# Altium PCB PN-Power.PcbDoc
Units mm, origin at the board's own origin, x right, y up, seen from the top; angles counter-clockwise.
Board outline 44.12 x 67.89 mm, 2 copper layers (Top Layer, Bottom Layer); 24 components, 12 nets, 57 pads, 0 vias.
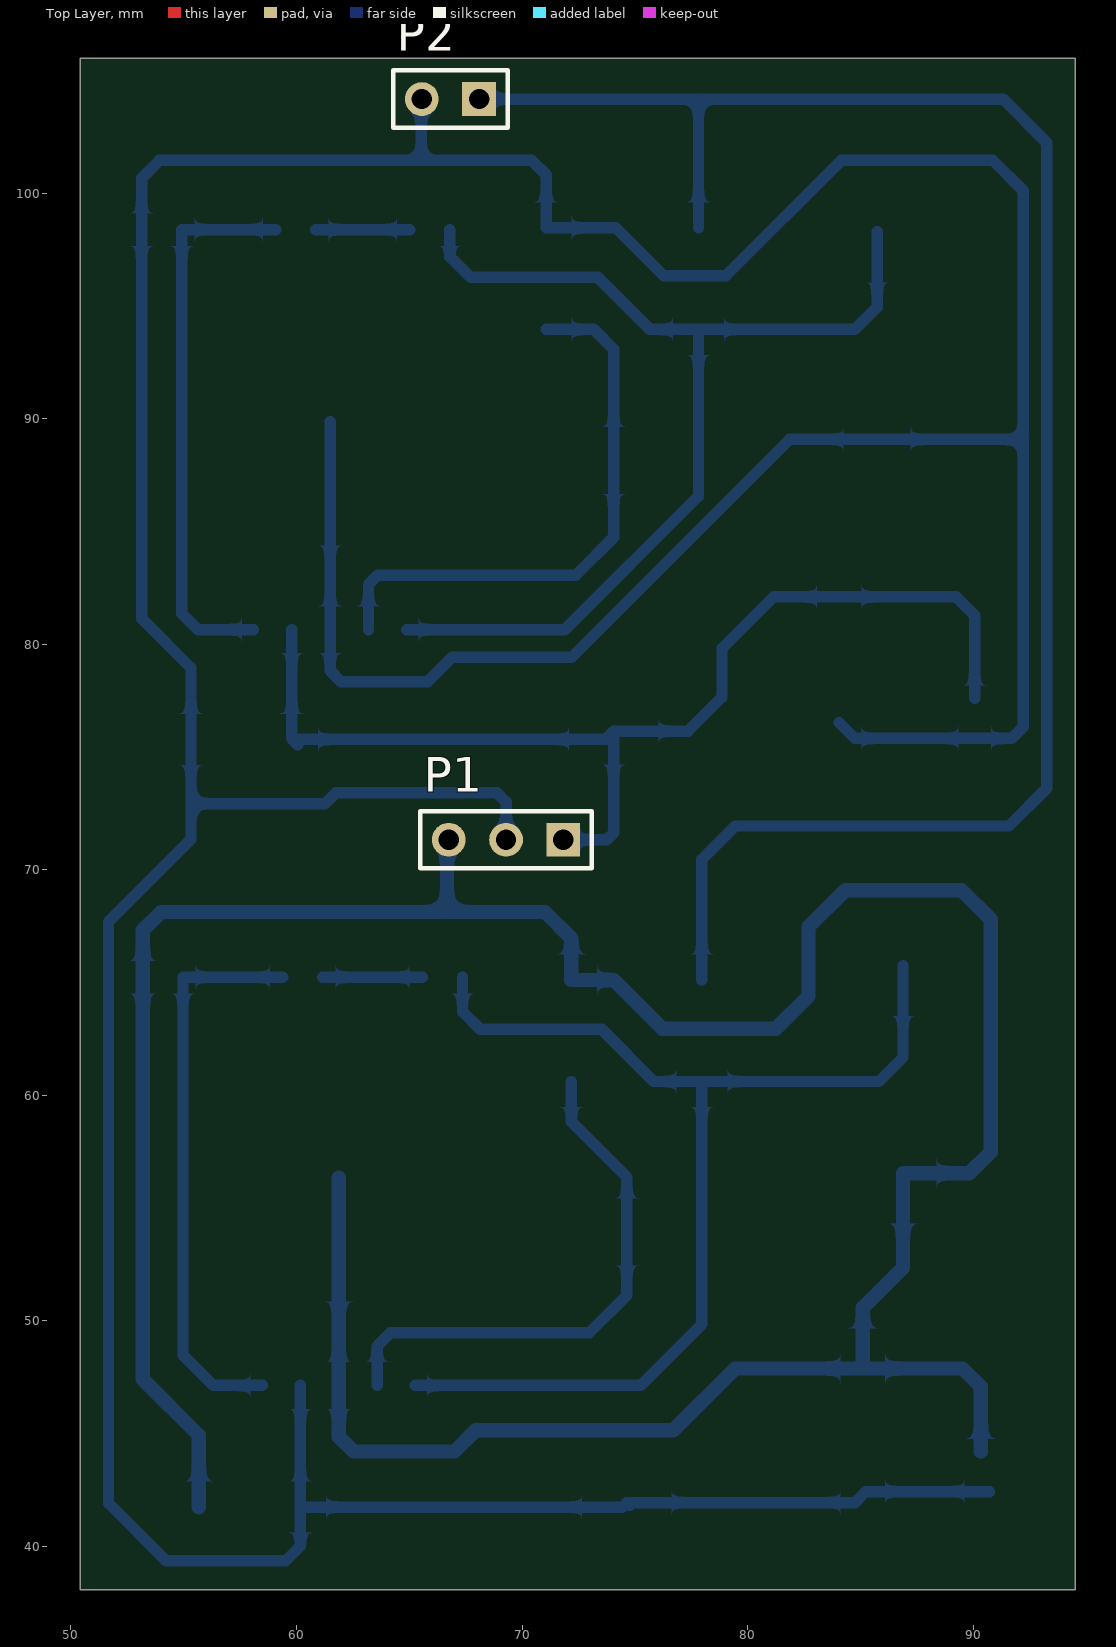
[diagram p0: Top Layer view]
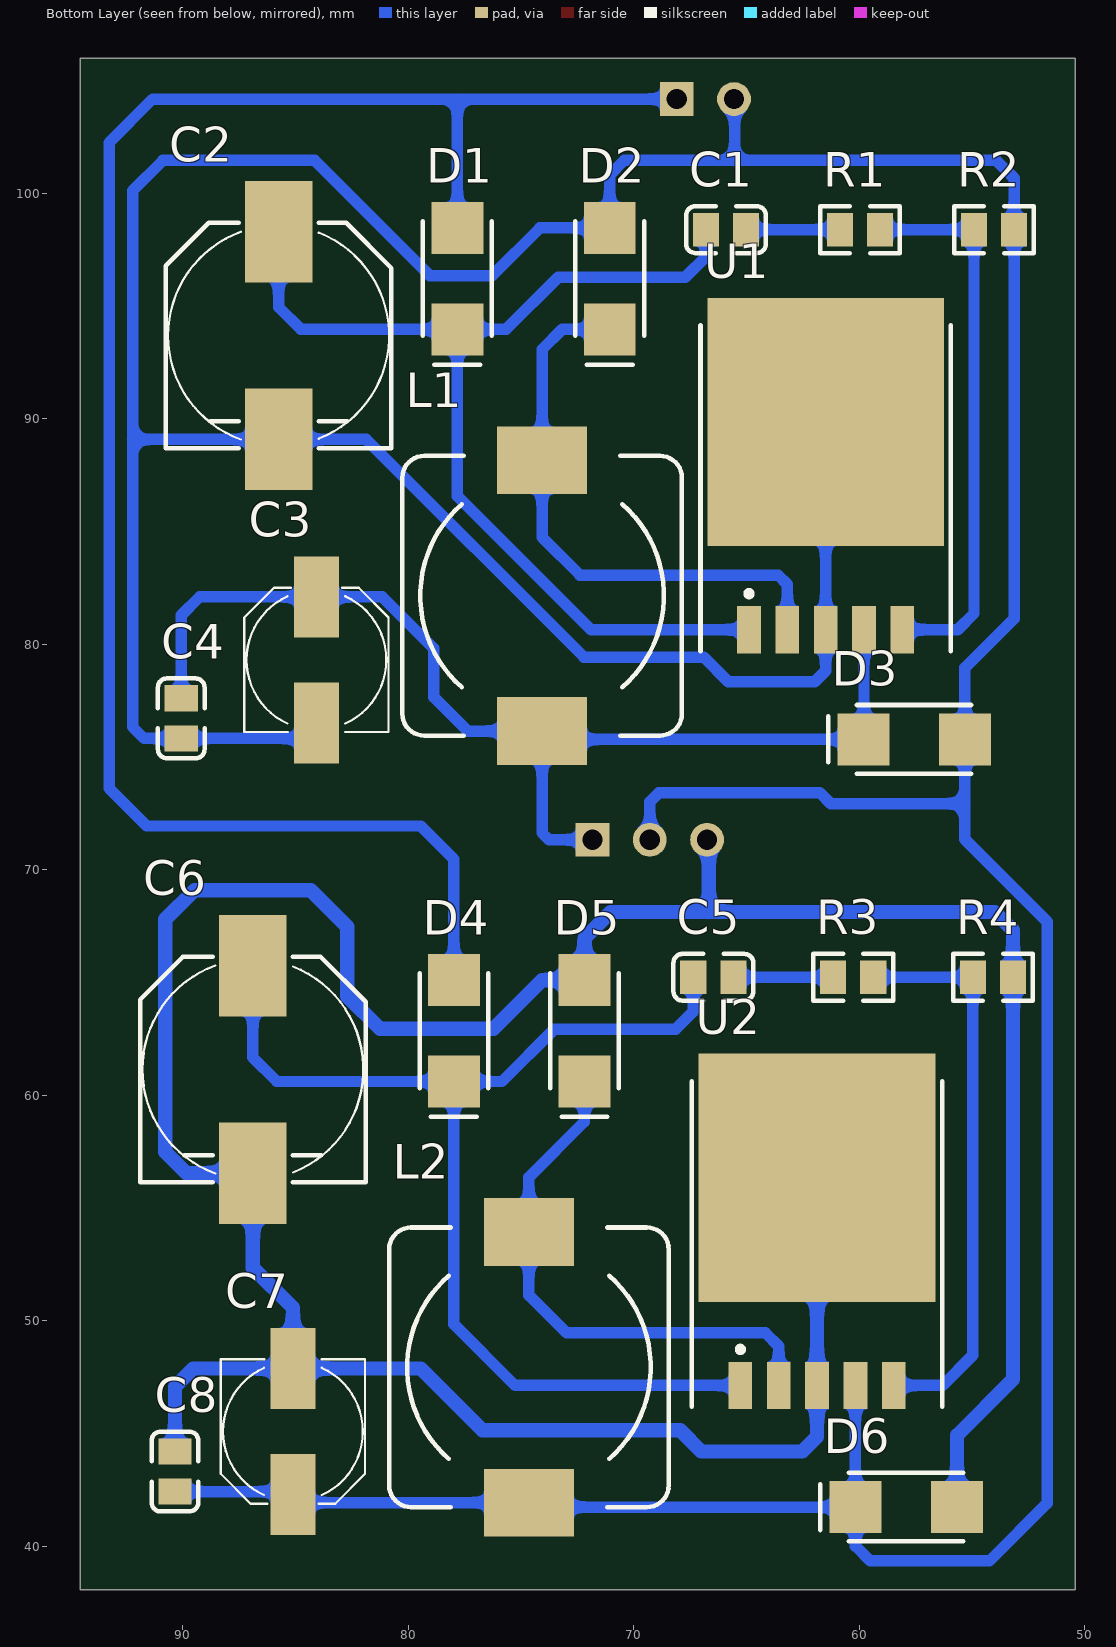
[diagram p1: Bottom Layer view, seen from below]

## Layer stack, top to bottom
Top Solder: solder mask 0.0102, Solder Resist, Dk 3.5
Top Layer: signal copper 0.0356
Dielectric 1: dielectric 0.32, FR-4, Dk 4.8
Bottom Layer: signal copper 0.0356
Bottom Solder: solder mask 0.0102, Solder Resist, Dk 3.5

## Board outline
50.419,38.075 50.419,105.969 94.539,105.969 94.539,38.075

## Design rules (kind name [scope] priority, off if disabled: settings)
Clearance Poly [InPolygon] p1: gap=0.254 ignorepadtopadclearanceinfootprint=FALSE
Clearance [All] p2: gap=0.178 ignorepadtopadclearanceinfootprint=FALSE
HoleSize [All] p1: absolutevalues=TRUE maxlimit=2.54 minlimit=0.305 maxpercent=80.000 minpercent=20.000
PolygonConnect [All] p1: connectstyle=Relief reliefconductorwidth=0.254 reliefentries=4 polygonreliefangle="90 Angle" airgapwidth=0.254
RoutingVias [All] p1: holewidth=0.381 width=0.635 viastyle="Through Hole" minholewidth=0.305 minwidth=0.61 maxholewidth=0.711 maxwidth=1.27
SolderMaskExpansion [All] p1: expansion=0.102
UnRoutedNet [All] p1: checkbadconnections=TRUE
Width [All] p1: maxlimit=1.27 minlimit=0.203 preferedwidth=0.254
28 further rules are at their usual default settings.

## Components (designator, comment, footprint, x,y, rotation, side; value= is the part's Value field where it differs from the comment)
C1 "100nF" 0805_C 65.913,98.374 r0 bottom
C2 "470uF/35V" C-RB-S10 85.75,93.675 r270 bottom
C3 "220uF/16V" C-RB-S6 84.074,79.299 r270 bottom
C4 "100nF" 0805_C 90.068,76.707 r90 bottom
C5 "100nF" 0805_C 66.472,65.227 r0 bottom
C6 "470uF/35V" C-RB-S10 86.893,61.138 r270 bottom
C7 "220uF/16V" C-RB-S6 85.115,45.085 r90 bottom
C8 "100nF" 0805_C 90.348,43.307 r270 bottom
D1 "FR107" DIODE-SMA 77.826,98.455 r270 bottom
D2 "SS54" DIODE-SMA 71.069,98.455 r270 bottom
D3 "SS54" DIODE-SMA 55.321,75.775 r0 bottom
D4 "FR107" DIODE-SMA 77.978,65.104 r270 bottom
D5 "SS54" DIODE-SMA 72.187,65.104 r270 bottom
D6 "SS54" DIODE-SMA 55.673,41.732 r0 bottom
L1 "33uH" L-SMD-12 74.066,82.144 r270 bottom
L2 "33uH" L-SMD-12 74.651,47.93 r270 bottom
P1 "Header 3" HDR3X1_A 71.831,71.323 r180 top
P2 "Header 2" HDR2X1_A 68.097,104.165 r180 top
R1 "47KΩ" 0805_R 59.969,98.374 r0 bottom
R2 "47KΩ" 0805_R 54.026,98.374 r0 bottom
R3 "47KΩ" 0805_R 60.274,65.227 r0 bottom
R4 "47KΩ" 0805_R 54.077,65.227 r0 bottom
U1 "LM2596S-5.0" TO-263-5 61.493,84.861 r180 bottom
U2 "LM2596S-5.0" TO-263-5 61.874,51.35 r180 bottom

## Footprints (in the part's own frame and the unit in brackets; to place one, negate y for a bottom-side part, rotate by r counter-clockwise, add the part's x,y. Pads: shape width x height; smd on the part's side, far side on the other; paste and mask are expansions set on the pad)
0805_C [mm]
  rect 1.16x1.47 smd: 1(-0.89,0) 2(0.89,0)
  silkscreen extent -1.77,-1.04 1.77,1.04, body extent -1,-0.63 1,0.62, height 0.77
0805_R [mm]
  rect 1.16x1.47 smd: 1(-0.89,0) 2(0.89,0)
  silkscreen extent -1.77,-1.04 1.77,1.03, body extent -1,-0.63 1,0.62, height 0.49
C-RB-S6 [mm] "贴片电解"
  rect 3.6x2 smd: 1(-2.794,0) 2(2.794,0)
  silkscreen extent -3.2,-3.2 3.2,3.2, body extent -3.15,-3.12 3.15,3.17, height 7.7
C-RB-S10 [mm] "贴片电解"
  rect 4.5x3 smd: 1(-4.6,0) 2(4.6,0)
  silkscreen extent -5,-5 5,5, body extent -4.97,-4.92 5.03,5.08, height 10
DIODE-SMA [mm] "贴片二极管"
  rect 2.3x2.3 smd: 1(0,0) 2(4.5,0)
  silkscreen extent -0.29,-1.52 6.06,1.52, body extent -0.67,-1.4 5.17,1.4, height 3
HDR2X1_A [mm] "Connector; Header; 2 Position"
  rect 1.5x1.5 hole 0.9: 1(0,0)
  round 1.5 hole 0.9: 2(2.54,0)
  silkscreen extent -1.27,-1.27 3.81,1.27
HDR3X1_A [mm] "Connector; Header; 3 Position"
  rect 1.5x1.5 hole 0.9: 1(0,0)
  round 1.5 hole 0.9: 2(2.54,0) 3(5.08,0)
  silkscreen extent -1.27,-1.27 6.35,1.27
L-SMD-12 [mm] "贴片电感12*12"
  rect 3x4 smd: 1(-6,0) 2(6,0)
  silkscreen extent -6.2,-6.2 6.2,6.2, body extent -6.2,-6.22 6.2,6.17, height 2.5
TO-263-5 [mm] "贴片LM2596"
  rect 1.05x2.1 smd: 1(-3.4,-4.225) 2(-1.7,-4.225) 3(0,-4.225) 4(1.7,-4.225) 5(3.4,-4.225)
  rect 10.5x11 smd: 6(0,4.987)
  silkscreen extent -5.55,-5.18 5.55,9.28, body extent -5.33,-4.7 5.33,10.29, height 3

## Part data
C1 C4 C5 C8: library part "0805 100nF(104) 10% 50V", "贴片电容", Package=0805, SuppliersPartNumber=C49678, ComponentLink1Description=供应商链接, ComponentLink1URL=http://www.szlcsc.com/product/details_50686.html, Supplier=LC
C2 C3 C6 C7: library part "Cap Pol", "极性电解电容", LatestRevisionDate=17-Jul-2002, LatestRevisionNote="Re-released for DXP Platform.", PackageReference=RB7.6-15, Published=8-Jun-2000, Publisher="Altium Limited"
D1 D2 D3 D4 D5 D6: library part Diode, "二极管", PackageDocument=Sep-1996, Code_JEDEC=DO-214-AB, LatestRevisionDate=17-Jul-2002, LatestRevisionNote="Re-released for DXP Platform.", PackageReference=SMC, Published=8-Jun-2000, Publisher="Altium Limited"
L1 L2: library part Inductor, "电感", Code_IEC=1005, Code_JEITA=0402, LatestRevisionDate=17-Jul-2002, LatestRevisionNote="Re-released for DXP Platform.", PackageReference=0402-A, Published=8-Jun-2000, Publisher="Altium Limited"
P1 P2: "接插件", LatestRevisionDate=17-Jul-2002, LatestRevisionNote="Re-released for DXP Platform.", Publisher="Altium Limited"
R1 R2 R3 R4: library part "0805 47KΩ (4702) 1%", "贴片电阻", Package=0805, SuppliersPartNumber=C17713, ComponentLink1Description=供应商链接, ComponentLink1URL=http://www.szlcsc.com/product/details_18401.html, Supplier=LC
U1 U2: "5V稳压芯片", ComponentLink1Description="Manufacturer Link", ComponentLink1URL=http://www.national.com/, ComponentLink2Description=Datasheet, ComponentLink2URL=http://www.national.com/ds.cgi/LM/LM2596.pdf, ComponentLink3Description="URL Link1", ComponentLink3URL=http://www.national.com/pf/LM/LM2596.html, DatasheetVersion=Dec-1997, Note="Tab is connected to GND", PackageDescription="D2-PAK; 5 Leads; Body 14.4 (inc. leads) x 10.4 mm (LxW max)", PackageReference=TS5B, Published=15-Apr-2002, Publisher="Altium Limited"

## Nets (pads, with @x,y where several pads share a name; then routed paths per layer and width w, separated by ;. In a path a pad name is that pad's centre, name@x,y a point inside that pad or via, vN(x,y) a via of type N, cw(c..) or ccw(c..) an arc to the next point about the centre after c; other vN are vias at no path point)
+5: C3.1 C4.2 D3.2 L1.2 P1.1 U1.4 | length 50.1
  Bottom Layer w0.508: U1.4 59.793,75.898 D3.2@59.821,75.87 ; D3.2@60.056,75.54 D3.2 73.697,75.775 L1.2 ; P1.1 73.762,71.323 74.066,71.628 L1.2 ; C4.2 90.068,81.28 89.256,82.093 C3.1 81.153,82.093 78.867,79.807 78.867,77.648 77.363,76.144 L1.2
+12: D1.1 D4.1 P2.1 | length 82.3
  Bottom Layer w0.508: P2.1 77.826,104.165 ; D1.1 77.826,104.165 ; D4.1 77.978,70.46 79.451,71.933 91.592,71.933 93.269,73.609 93.269,102.235 91.338,104.165 77.826,104.165
-5V: C6.2 C7.2 C8.1 D5.1 D6.1 P1.3 R4.1 U2.3 U2.6 | length 144.8
  Bottom Layer w0.635: D6.1 55.673,44.911 53.187,47.397 R4.1 53.187,67.309 54,68.123 66.675,68.123 ; U2.6 U2.3 61.874,44.856 62.535,44.196 67.005,44.196 67.945,45.136 76.708,45.136 79.451,47.879 C7.2 ; P1.3 66.675,71.247 66.675,68.123 ; C8.1 90.348,47.066 89.535,47.879 C7.2 ; 66.675,68.123 71.018,68.123 72.187,66.954 D5.1 74.062,65.104 76.225,62.941 81.255,62.941 82.702,64.389 82.702,67.462 84.328,69.088 89.484,69.088 90.78,67.793 90.78,57.48 89.837,56.538 C6.2 86.893,52.349 85.115,50.571 C7.2
GND: C2.2 C3.2 C4.1 C7.1 C8.2 D2.1 D3.1 D6.2 L2.2 P1.2 P2.2 R2.1 U1.3 U1.6 U2.4 | length 252.2
  Bottom Layer w0.508: D3.1 55.321,72.923 ; D3.1@55.321,75.87 55.321,78.943 53.136,81.129 R2.1 53.136,100.659 53.924,101.448 65.532,101.448 ; U2.4 60.174,41.734 D6.2 ; U1.6 U1.3 61.493,78.816 61.976,78.334 65.811,78.334 66.904,79.426 72.212,79.426 81.862,89.075 C2.2 92.227,89.075 ; P2.2 65.532,104.14 65.532,101.448 ; P1.2 69.291,73 68.885,73.406 61.747,73.406 61.265,72.923 55.321,72.923 ; L2.2@74.778,41.803 L2.2 ; C3.2 84.762,75.817 C4.1 91.717,75.817 92.227,76.327 92.227,89.075 ; C8.2@90.729,42.417 C8.2 85.241,42.417 C7.1 84.754,41.93 L2.2 ; 55.321,72.923 55.321,71.349 51.664,67.691 51.664,67.564 51.664,41.91 54.229,39.345 59.512,39.345 60.173,40.005 D6.2 ; D6.2 74.453,41.732 L2.2 ; 65.532,101.448 70.434,101.448 71.069,100.813 D2.1 74.164,98.455 76.276,96.342 79.045,96.342 84.15,101.448 90.881,101.448 92.227,100.101 92.227,89.075
NetC1_1: C1.1 R1.2 | length 4.2
  Bottom Layer w0.508: R1.2 C1.1
NetC1_2: C1.2 C2.1 D1.2 U1.1 | length 48
  Bottom Layer w0.508: U1.1 71.899,80.636 77.826,86.563 D1.2 ; C1.2 66.803,97.179 67.716,96.266 73.355,96.266 75.667,93.955 D1.2 ; C2.1 85.75,94.945 84.76,93.955 D1.2
NetC5_1: C5.1 R3.2 | length 4.4
  Bottom Layer w0.508: R3.2 C5.1
NetC5_2: C5.2 C6.1 D4.2 U2.1 | length 51.4
  Bottom Layer w0.508: U2.1 75.268,47.125 77.978,49.835 D4.2 ; C5.2 67.362,63.702 68.148,62.916 73.533,62.916 75.844,60.604 D4.2 ; C6.1 86.893,61.671 85.827,60.604 D4.2
NetD2_2: D2.2 L1.1 U1.2 | length 25.4
  Bottom Layer w0.508: U1.2 63.193,82.65 63.602,83.058 72.39,83.058 74.066,84.734 L1.1 74.066,93.066 73.177,93.955 D2.2
NetD5_2: D5.2 L2.1 U2.2 | length 24.3
  Bottom Layer w0.508: U2.2 63.574,48.868 64.16,49.454 72.974,49.454 74.651,51.13 L2.1 74.651,56.363 72.187,58.826 D5.2
NetR1_1: R1.1 R2.2 U1.5 | length 24.7
  Bottom Layer w0.508: U1.5 55.635,80.636 54.916,81.355 R2.2 R1.1
NetR3_1: R3.1 R4.2 U2.5 | length 25.2
  Bottom Layer w0.508: U2.5 56.304,47.125 54.967,48.462 R4.2 R3.1

## Silkscreen, mask and mechanical layers (free items; w line width, h text height)
Mechanical 1:
  rectangle: 50.419,38.075 94.539,105.969
  lines w0.203: 50.419,38.075 50.419,105.969 94.539,105.969 94.539,38.075 50.419,38.075